# Altium PCB DOD Overdrive.PcbDoc
Units mm, origin at the board's own origin, x right, y up, seen from the top; angles counter-clockwise.
Board outline 57.16 x 79.55 mm, 4 copper layers (Top Layer, Gnd, Power, Bottom Layer), stack 0.603 mm thick; 36 components, 28 nets, 96 pads, 11 vias.
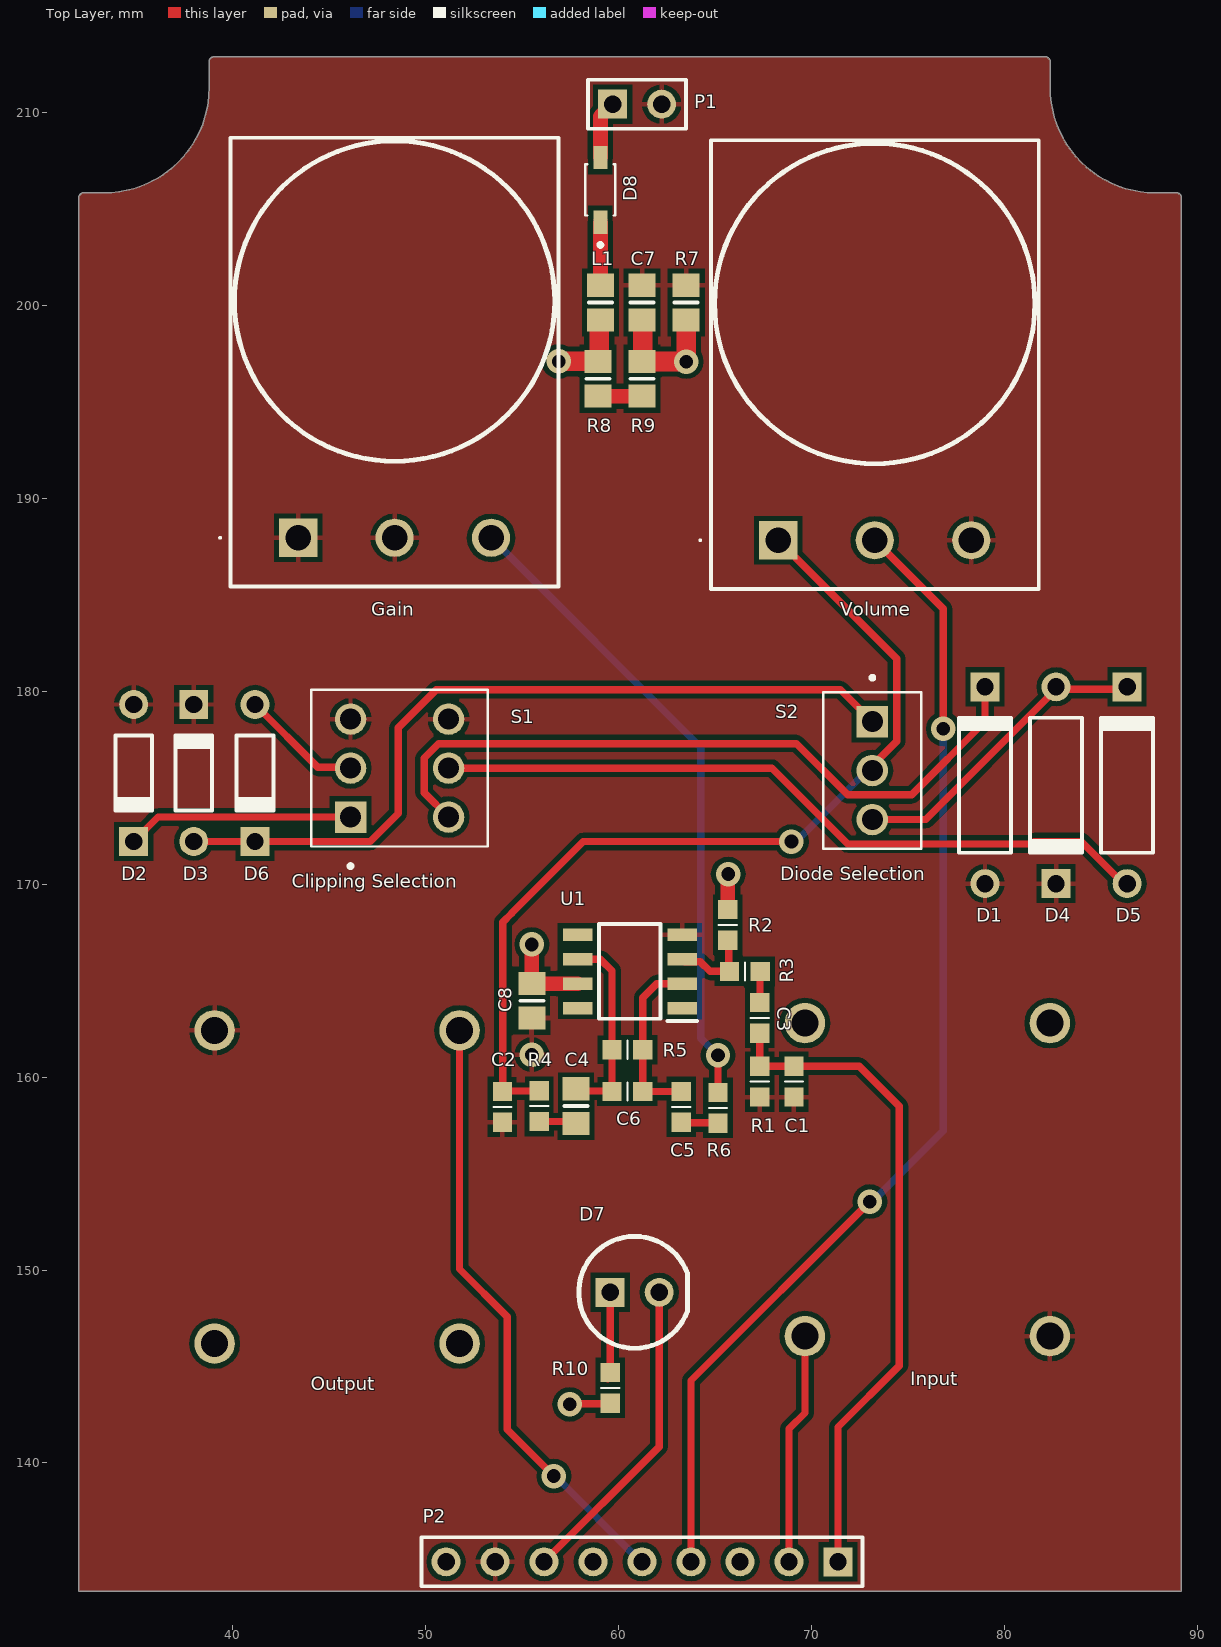
[diagram p0: Top Layer view]
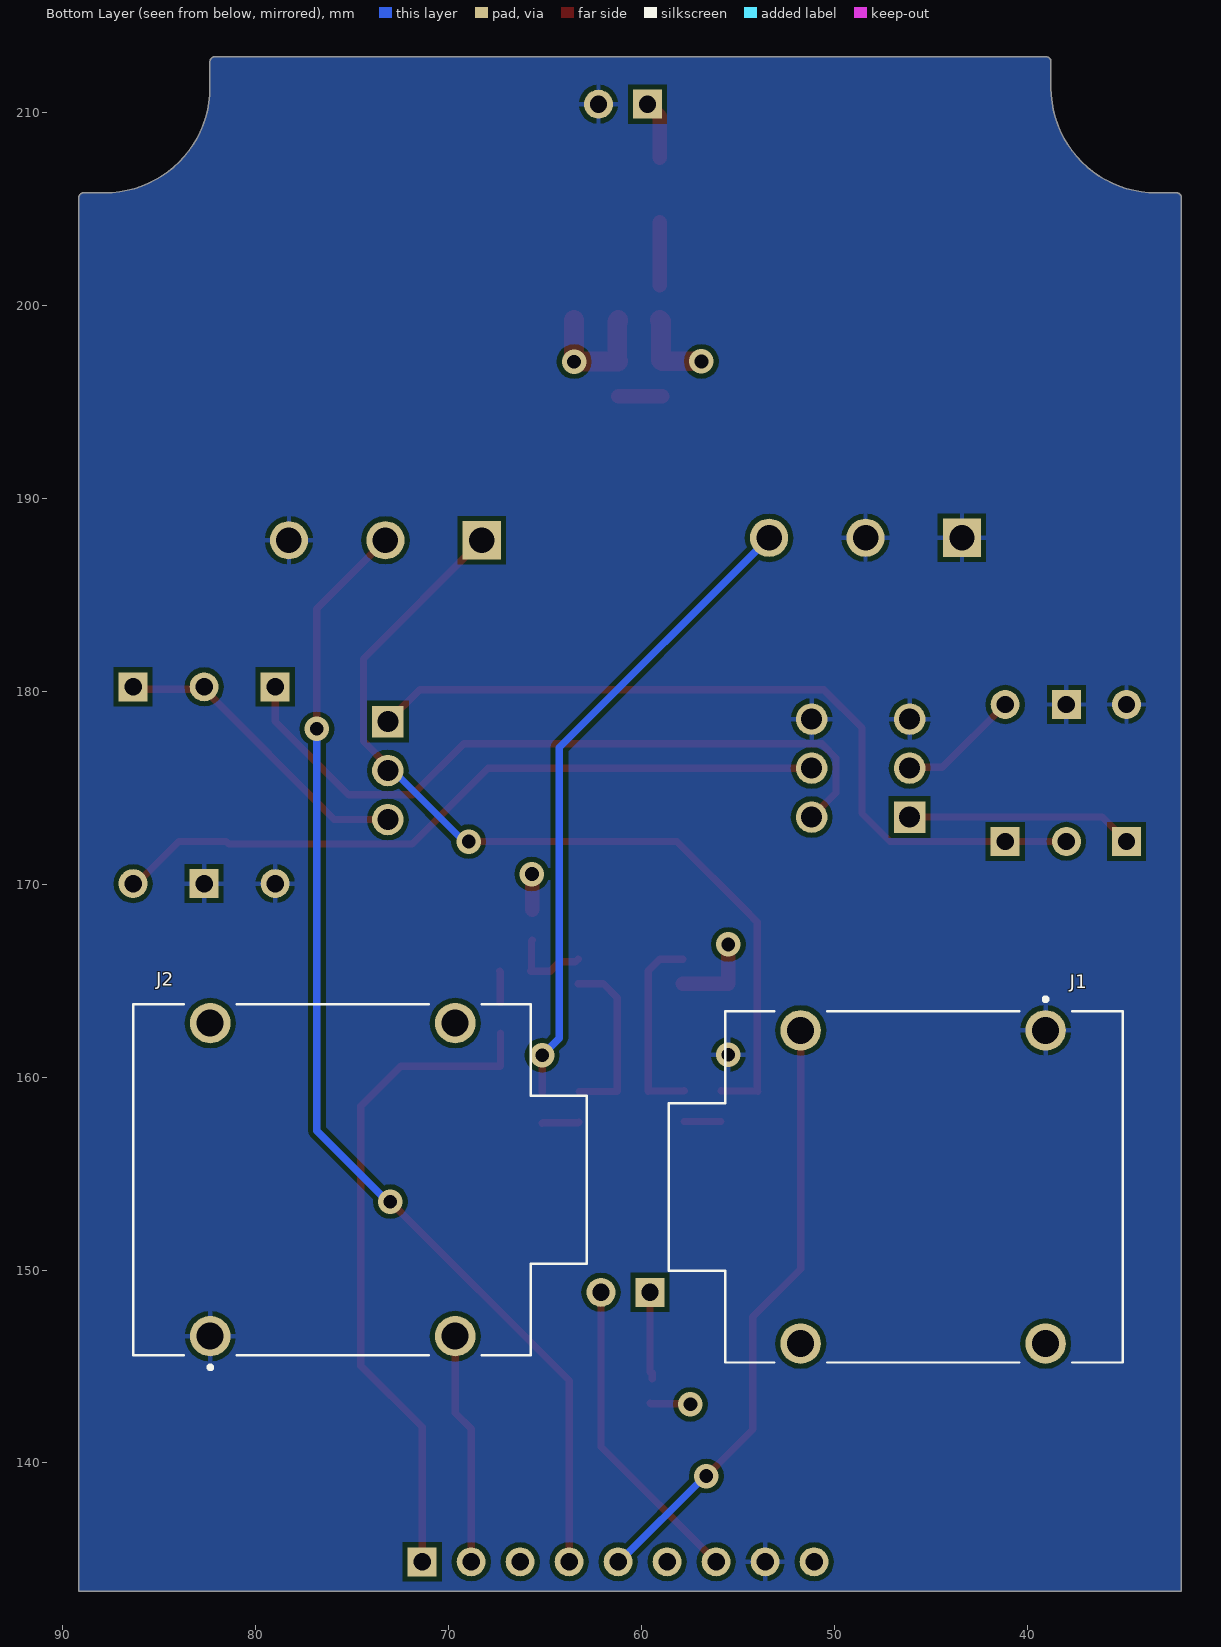
[diagram p1: Bottom Layer view, seen from below]
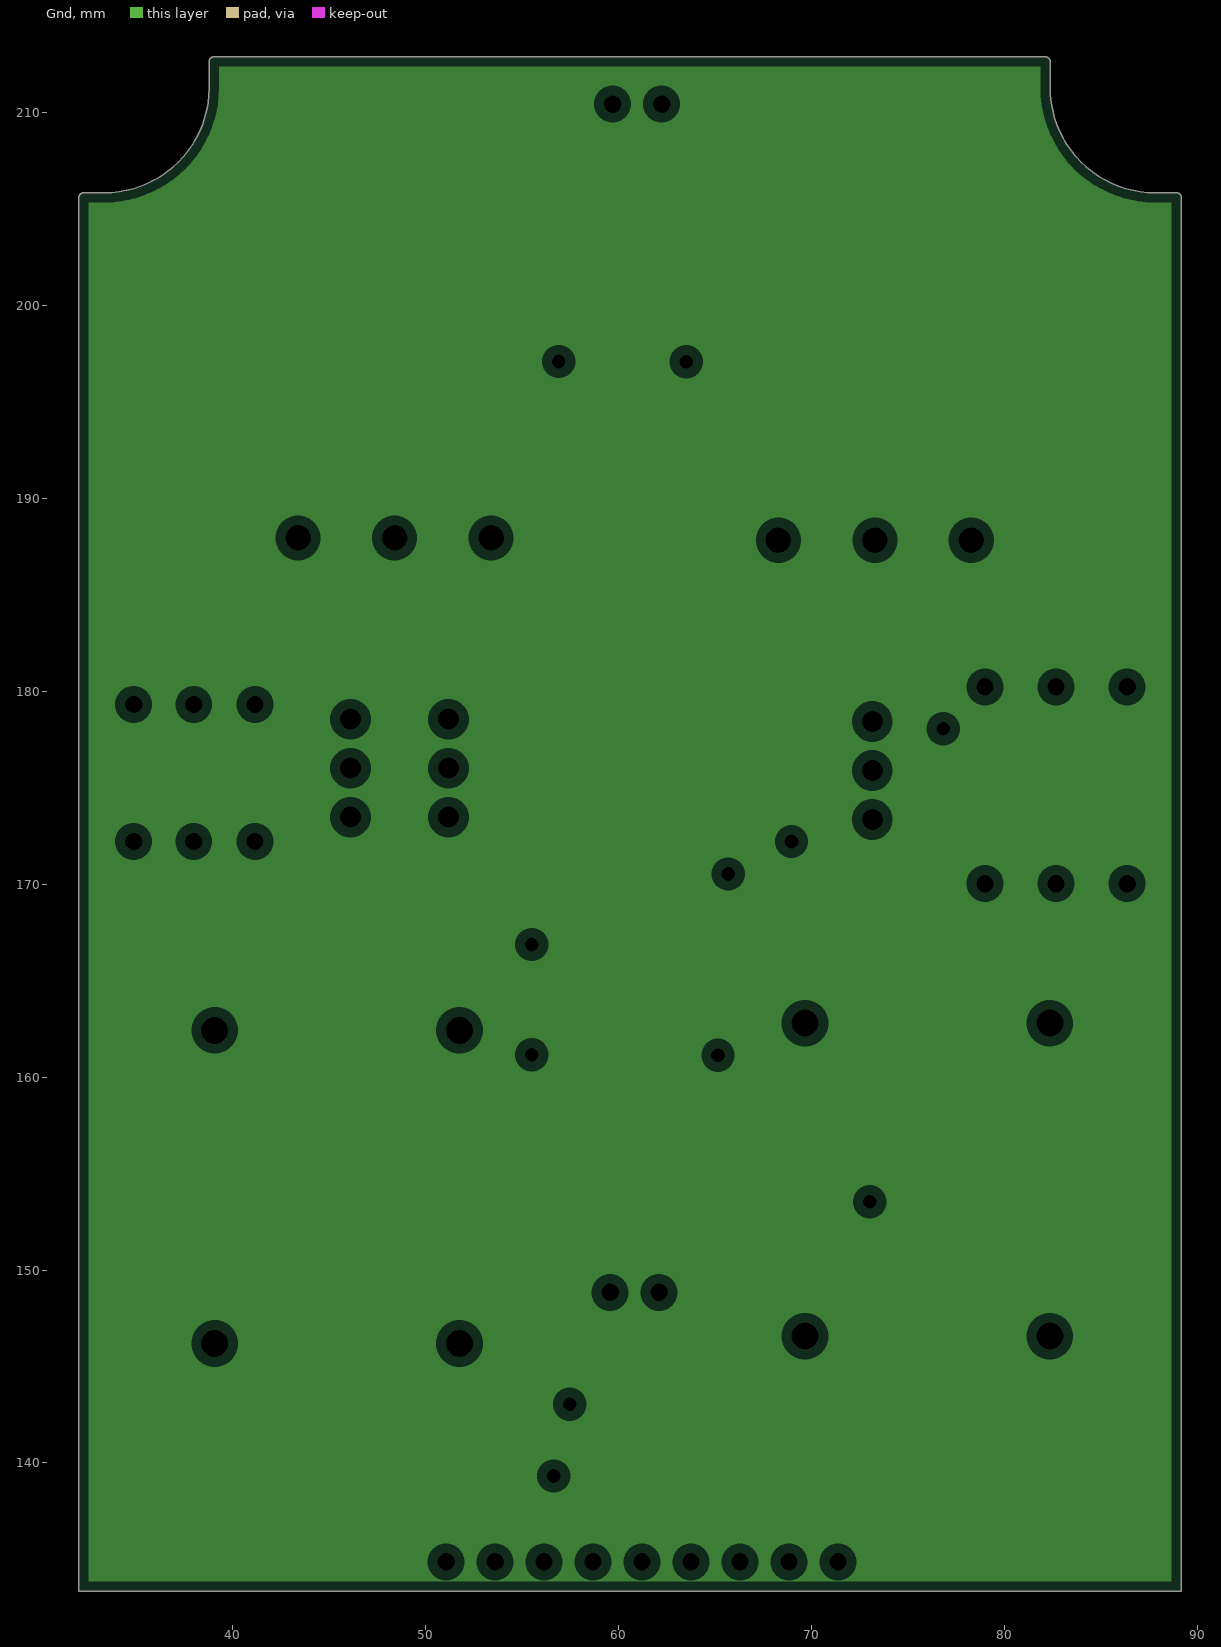
[diagram p2: Gnd, clearances drawn from the general rule]
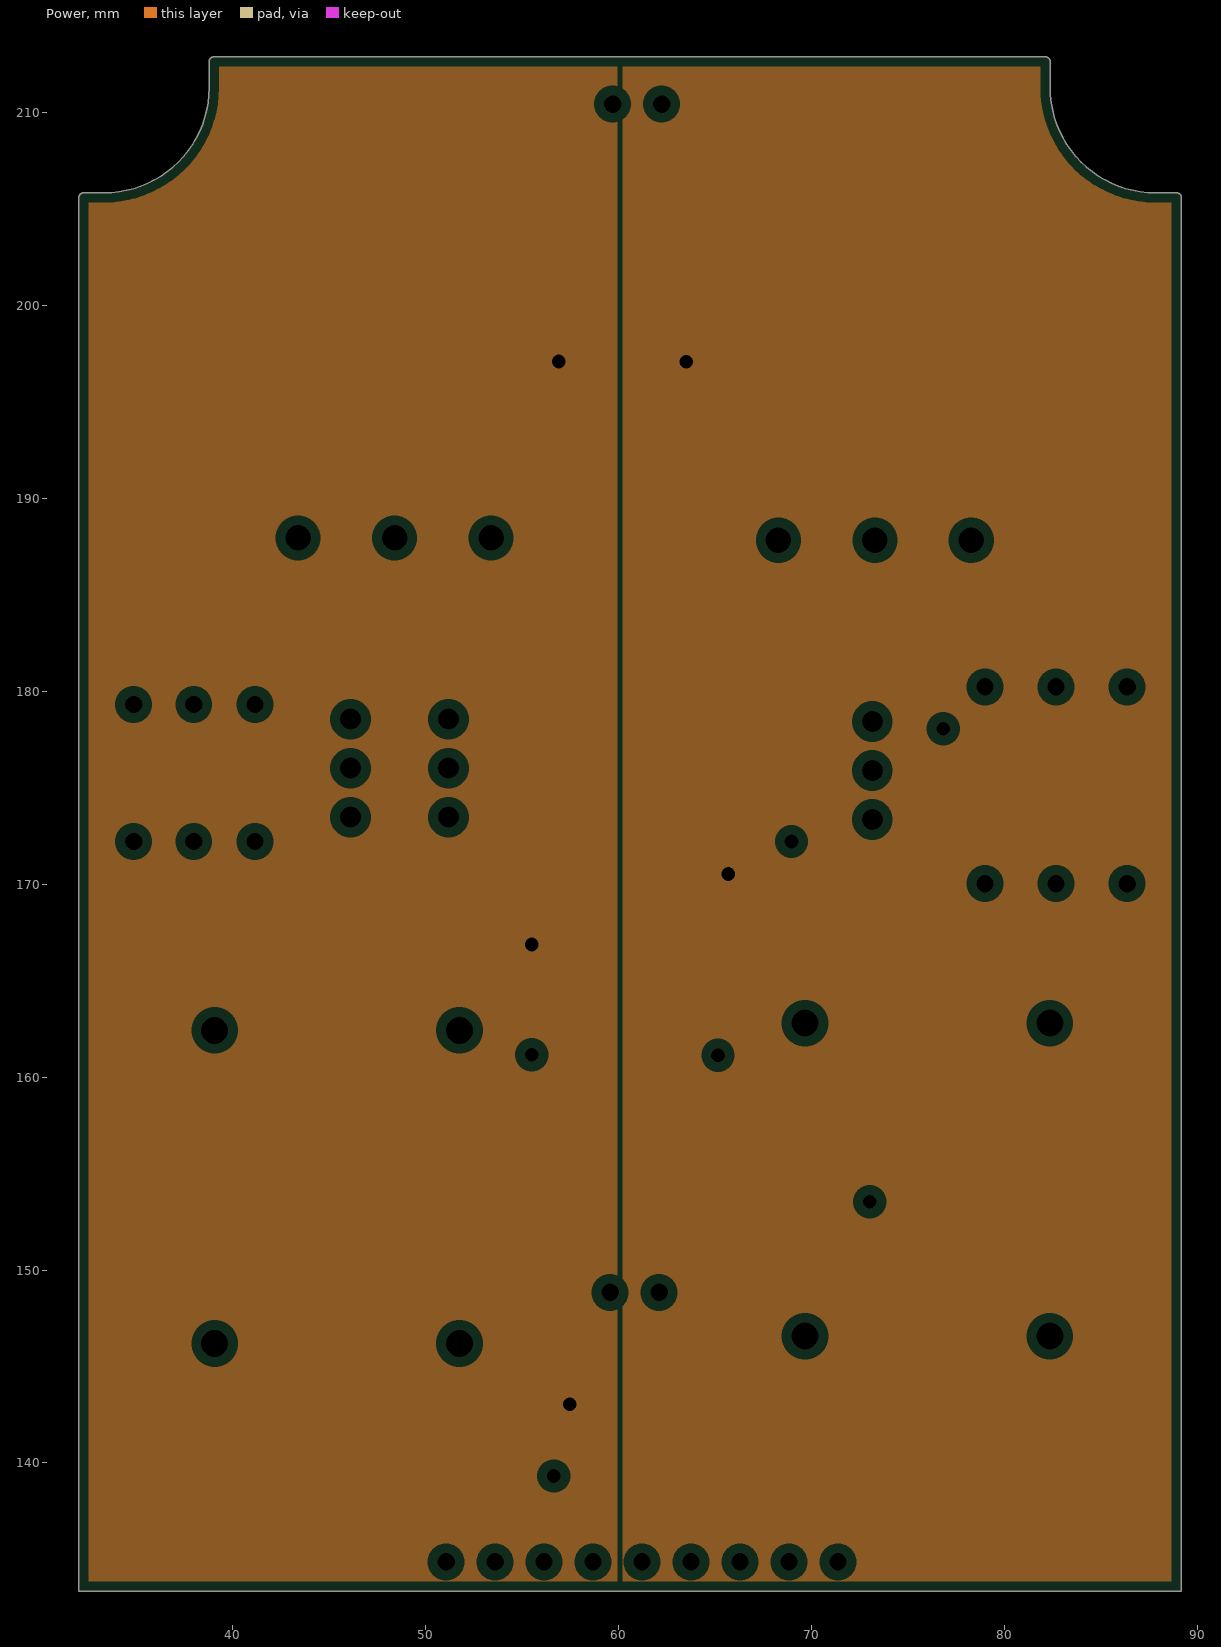
[diagram p3: Power, clearances drawn from the general rule]

## Layer stack, top to bottom
Top Solder: solder mask 0.0102, Solder Resist, Dk 3.5
Top Layer: signal copper 0.0356
Dielectric 2: prepreg 0.0711, PP-006, Dk 4.1
Gnd: plane copper 0.035
Dielectric 1: dielectric 0.32, FR-4, Dk 4.8
Power: plane copper 0.035, net (Multiple Nets)
Dielectric 3: prepreg 0.0711, PP-006, Dk 4.1
Bottom Layer: signal copper 0.0356
Bottom Solder: solder mask 0.0102, Solder Resist, Dk 3.5

## Board outline
32.014,133.35 89.173,133.35 89.173,205.595 ccw(c88.923,205.596) 88.923,205.845 87.823,205.845 cw(c87.823,211.295) 82.373,211.295 82.373,212.645 ccw(c82.123,212.646) 82.123,212.895 39.023,212.895 ccw(c39.023,212.646) 38.773,212.645 38.773,211.295 cw(c33.323,211.295) 33.323,205.845 32.264,205.845 32.26,205.845 32.256,205.845 32.252,205.845 32.248,205.845 32.245,205.845 32.241,205.844 32.237,205.844 32.233,205.844 32.229,205.843 32.225,205.842 32.221,205.842 32.217,205.841 32.213,205.84 32.21,205.839 32.206,205.839 32.202,205.838 32.198,205.837 32.194,205.836 32.191,205.834 32.187,205.833 32.183,205.832 32.179,205.831 32.176,205.829 32.172,205.828 32.168,205.826 32.165,205.825 32.161,205.823 32.158,205.822 32.154,205.82 32.151,205.818 32.147,205.816 32.144,205.815 32.14,205.813 32.137,205.811 32.133,205.809 32.13,205.807 32.127,205.804 32.124,205.802 32.12,205.8 32.117,205.798 32.114,205.795 32.111,205.793 32.108,205.791 32.105,205.788 32.102,205.786 32.099,205.783 32.096,205.78 32.093,205.778 32.09,205.775 32.087,205.772 32.085,205.769 32.082,205.767 32.079,205.764 32.077,205.761 32.074,205.758 32.071,205.755 32.069,205.752 32.067,205.749 32.064,205.746 32.062,205.742 32.06,205.739 32.057,205.736 32.055,205.733 32.053,205.729 32.051,205.726 32.049,205.723 32.047,205.719 32.045,205.716 32.043,205.712 32.041,205.709 32.04,205.705 32.038,205.702 32.036,205.698 32.035,205.695 32.033,205.691 32.032,205.688 32.03,205.684 32.029,205.68 32.028,205.676 32.026,205.673 32.025,205.669 32.024,205.665 32.023,205.661 32.022,205.658 32.021,205.654 32.02,205.65 32.019,205.646 32.019,205.642 32.018,205.638 32.017,205.635 32.017,205.631 32.016,205.627 32.016,205.623 32.015,205.619 32.015,205.615 32.015,205.611 32.014,205.607 32.014,205.603 32.014,205.599 32.014,205.595

## Design rules (kind name [scope] priority, off if disabled: settings)
Clearance [All] p1: gap=0.254 ignorepadtopadclearanceinfootprint=TRUE except(0: Arc-Hole Track-Hole SMDPad-Hole THPad-Hole Via-Hole Fill-Hole Poly-Hole Region-Hole Text-Hole)
ComponentClearance [All] p1: gap=0 collisioncheckmode=3 verticalgap=0 showdistances=FALSE
Height [All] p1: minheight=0 maxheight=254 prefheight=12.7
PlaneClearance [All] p1: clearance=0.508
PlaneConnect [All] p1: planeconnectstyle=Relief reliefexpansion=0.508 reliefentries=4 reliefconductorwidth=0.254 reliefairgap=0.254
PolygonConnect [All] p1: connectstyle=Relief reliefconductorwidth=0.254 reliefentries=4 polygonreliefangle="90 Angle" airgapwidth=0.254
RoutingVias [All] p1: holewidth=0.711 width=1.27 viastyle="Through Hole" minholewidth=0.711 minwidth=1.27 maxholewidth=0.711 maxwidth=1.27
SilkToSolderMaskClearance [IsPad] p1: minsilkscreentomaskgap=0.1 clearancetoexposedcopper=TRUE
SolderMaskExpansion [All] p1: expansion=0.102 istentingtop=FALSE
Width Width_Power [InNetClass('Power')] p1: maxlimit=1.27 minlimit=0.254 preferedwidth=0.762
Width [All] p2: maxlimit=0.508 minlimit=0.254 preferedwidth=0.381
25 further rules are at their usual default settings.

## Classes and differential pairs
net class Power: +4.5V +9V DC_IN NetD8_2 NetR8_1

## Components (designator, comment, footprint, x,y, rotation, side; value= is the part's Value field where it differs from the comment)
C1 "Cap" SMD_0603 69.088,159.766 r270 top value=20nF
C2 "Cap" SMD_0603 53.975,158.458 r270 top value=10nF
C3 "Cap" SMD_0603 67.31,163.068 r270 top value=10nF
C4 "Cap Pol" SMD_0805 57.785,158.496 r90 top value=100pF
C5 "Cap" SMD_0603 63.246,158.458 r90 top value=47nF
C6 "Cap" SMD_0603 60.452,159.258 r180 top value=120pF
C7 "Cap Pol" SMD_0805 61.214,200.152 r270 top value=100pF
C8 "Cap Pol" SMD_0805 55.499,163.957 r90 top value=100pF
D1 "1N34A" DO-7 78.994,175.133 r90 top
D2 "1N4154" DO-35 34.859,175.768 r270 top
D3 "1N4154" DO-35 37.973,175.768 r90 top
D4 "1N34A" DO-7 82.677,175.133 r270 top
D5 "1N34A" DO-7 86.36,175.133 r90 top
D6 "1N4154" DO-35 41.148,175.768 r270 top
D7 "LED TH" LED5mm 59.563,148.844 r0 top
D8 "Schottky" SOD123 59.055,205.994 r90 top
Gain "Potentiometer, Logarithmic" PDB181K420K103B 43.387,187.96 r0 top locked value=100k
J1 "Output" NEUTRIK_NMJ4HCD2 35.052,154.305 r180 bottom locked
J2 "Input" NEUTRIK_NMJ4HCD2 86.36,154.686 r0 bottom locked
L1 "Bead" SMD_0805 59.055,200.152 r270 top
P1 "Header 2" HDR1X2_2.54 59.69,210.439 r0 top
P2 "Header 9" HDR1X9_2.54 71.374,134.874 r180 top
R1 "Res" SMD_0603 67.31,159.766 r270 top value=1M
R2 "Res" SMD_0603 65.659,167.894 r90 top value=470k
R3 "Res" SMD_0603 66.548,165.481 r0 top value=10k
R4 "Res" SMD_0603 55.88,158.496 r270 top value=10k
R5 "Res" SMD_0603 60.452,161.417 r180 top value=1M
R6 "Res" SMD_0603 65.151,158.407 r270 top value=4.7k
R7 "Res" SMD_0805 63.5,200.152 r90 top value=1M
R8 "Res" SMD_0805 58.928,196.204 r90 top value=100
R9 "Res" SMD_0805 61.214,196.204 r270 top value=1M
R10 "Res" SMD_0603 59.563,143.891 r90 top value=470k
S1 "Clipping Selection" SW_200MDP1T1B1M2QEH 48.641,176.022 r90 top locked
S2 "Diode Selection" SW_200MSP1T2B4M2QE 73.152,175.895 r270 top locked
U1 "TL081H" SOIC127P600X175-8N 60.579,165.481 r180 top
Volume "Potentiometer, Linear" PDB181K420K103B 68.279,187.833 r0 top locked value=100k

## Footprints (in the part's own frame and the unit in brackets; to place one, negate y for a bottom-side part, rotate by r counter-clockwise, add the part's x,y. Pads: shape width x height; smd on the part's side, far side on the other; paste and mask are expansions set on the pad)
DO-7 [mm] "Diode, Axial; Body 7 x 2.7 mm (LxDia. max), Lead Dia. 0.53 mm (max)"
  round 1.5 hole 0.9: 1(-5.1,0)
  rect 1.5x1.5 hole 0.9: 2(5.1,0)
  silkscreen extent -3.5,-1.35 3.6,1.35, body extent -5.35,-1.22 5.31,1.22, height 2.94
DO-35 [mm] "Diode, Axial; Body 3.8 x 1.9 mm (LxDia. max), Lead Dia. 0.53 mm (max)"
  round 1.5 hole 0.9: 1(-3.55,0)
  rect 1.5x1.5 hole 0.9: 2(3.55,0)
  silkscreen extent -1.95,-0.95 2.05,0.95, body extent -3.78,-0.93 3.78,0.92, height 1.92
HDR1X2_2.54 [mm] "Connector; Header; 2 Position; 2.54mm"
  rect 1.5x1.5 hole 0.9: 1(0,0)
  round 1.5 hole 0.9: 2(2.54,0)
  silkscreen extent -1.27,-1.27 3.81,1.27, body extent -1.27,-1.27 3.81,1.27, height 9.5
HDR1X9_2.54 [mm] "Connector; Header; 9 Position; 2.54mm"
  rect 1.5x1.5 hole 0.9: 1(0,0)
  round 1.5 hole 0.9: 2(2.54,0) 3(5.08,0) 4(7.62,0) 5(10.16,0) 6(12.7,0) 7(15.24,0) 8(17.78,0) 9(20.32,0)
  silkscreen extent -1.27,-1.27 21.59,1.27, body extent -1.27,-1.27 21.59,1.27, height 9.5
LED5mm [mm] "Led 5 mm"
  rect 1.5x1.5 hole 0.9: 1(0,0)
  round 1.5 hole 0.9: 2(2.54,0)
  silkscreen extent -1.63,-2.9 4,2.9, body extent -1.7,-2.95 3.7,2.94, height 8.7
NEUTRIK_NMJ4HCD2 [mm]
  round 2.1 hole 1.4: S(-4,8.115) SN(-4,-8.115) T(-16.7,8.115) TN(-16.7,-8.115)
  silkscreen extent -23.53,-9.1 0,9.83, body extent -23.51,-9.06 7.49,9.14, height 15.59
PDB181K420K103B [mm]
  rect 1.98x1.98 hole 1.32: 1(0,0)
  round 1.98 hole 1.32: 2(5,0) 3(10,0)
  silkscreen extent -4.1,-2.52 13.5,20.74, body extent -3.48,-4.32 13.52,20.68, height 30
SMD_0603 [mm] "SMD, Body 0.06x0.03 inch, 1.6x0.8mm, IPC Medium Density"
  rect 1x1 smd: 1(-0.8,0) 2(0.8,0)
  silkscreen extent 0,-0.48 0,0.47, body extent -0.87,-0.48 0.87,0.48, height 0.85
SMD_0805 [mm] "SMD, Body 0.08x0.05 inch, Body 2.0x1.3mm, IPC Medium Density"
  rect 1.2x1.4 smd: 1(-0.9,0) 2(0.9,0)
  silkscreen extent 0,-0.6 0,0.6, body extent -1.07,-0.7 1.07,0.7, height 0.65
SOD123 [mm]
  rect 1.21x0.73 smd: 1(1.68,0) 2(-1.68,0)
  silkscreen extent -2.95,-0.77 1.33,0.77, body extent -1.83,-0.77 1.83,0.77, height 1.44
SOIC127P600X175-8N [mm]
  rect 1.528x0.65 smd: 1(-2.711,1.905) 2(-2.711,0.635) 3(-2.711,-0.635) 4(-2.711,-1.905) 5(2.711,-1.905) 6(2.711,-0.635) 7(2.711,0.635) 8(2.711,1.905)
  silkscreen extent -3.47,-2.45 1.6,2.58, body extent -3.01,-2.45 3.01,2.45, height 1.63
SW_200MDP1T1B1M2QEH [mm]
  rect 1.635x1.635 hole 1.09: 1(-2.54,2.54)
  round 1.635 hole 1.09: 2(0,2.54) 3(2.54,2.54) 4(-2.54,-2.54) 5(0,-2.54) 6(2.54,-2.54)
  silkscreen extent -5.18,-4.57 4.07,4.57, body extent -4.02,-4.6 4.12,4.54, height 19.5
SW_200MSP1T2B4M2QE [mm]
  rect 1.635x1.635 / inner round 1.635 / far side rect 1.635x1.635 hole 1.09: 1(-2.54,0)
  round 1.635 hole 1.09: 2(0,0) 3(2.54,0)
  silkscreen extent -4.91,-2.54 4.07,2.54, body extent -4.07,-3.05 4.06,3.05, height 19.55

## Part data
C1 C2 C3 C5 C6: "Capacitor", LatestRevisionDate=17-Jul-2002, LatestRevisionNote="Re-released for DXP Platform.", PackageDescription="Radial Cap, Thru-Hole; 2 Leads; 0.3 in Pin Spacing", PackageReference=RAD-0.3, Published=8-Jun-2000, Publisher="Altium Limited"
C4 C7 C8: "Polarized Capacitor", LatestRevisionDate=17-Jul-2002, LatestRevisionNote="Re-released for DXP Platform.", PackageDescription="Polarized Capacitor; 2 Leads", PackageReference=POLAR0.8, Published=8-Jun-2000, Publisher="Altium Limited"
D1 D4 D5: library part "Diode 1N434A", "Germanium Diode", Code_JEDEC=DO-204-AH, ComponentLink1Description="Manufacturer Link", ComponentLink1URL=http://www.fairchildsemi.com/, DatasheetVersion=1997, LatestRevisionDate=17-Jul-2002, LatestRevisionNote="Re-released for DXP Platform.", PackageDescription="Diode, Axial; Body 3.8 x 1.9 mm (LxDia. max), Lead Dia. 0.53 mm (max)", PackageReference=DO-35, Published=8-Jun-2000, Publisher="Altium Limited"
D2 D3 D6: library part "Diode 1N4154", "High Conductance Ultra Fast Diode", Code_JEDEC=DO-204-AH, ComponentLink1Description="Manufacturer Link", ComponentLink1URL=http://www.fairchildsemi.com/, DatasheetVersion=1997, LatestRevisionDate=17-Jul-2002, LatestRevisionNote="Re-released for DXP Platform.", PackageDescription="Diode, Axial; Body 3.8 x 1.9 mm (LxDia. max), Lead Dia. 0.53 mm (max)", PackageReference=DO-35, Published=8-Jun-2000, Publisher="Altium Limited"
D7: library part "LED TH, 5mm", "Typical RED, GREEN, YELLOW, AMBER GaAs LED", LatestRevisionDate=17-Jul-2002, LatestRevisionNote="Re-released for DXP Platform.", PackageDescription="SM LED; 2 Flat Leads", PackageReference=3.2X1.6X1.1, PackageVersion=Feb-2002, Published=8-Jun-2000, Publisher="Altium Limited"
D8: library part "Diode Schottky", "Schottky Diode", Code_JEDEC=DO-204-AH, ComponentLink1Description="Manufacturer Link", ComponentLink1URL=http://www.fairchildsemi.com/, DatasheetVersion=1997, LatestRevisionDate=17-Jul-2002, LatestRevisionNote="Re-released for DXP Platform.", PackageDescription="Diode, Axial; Body 3.8 x 1.9 mm (LxDia. max), Lead Dia. 0.53 mm (max)", PackageReference=DO-35, Published=8-Jun-2000, Publisher="Altium Limited"
Gain: "Logarithmic Potentiometer, TH, 5.08mm", Type=Log
J1 J2: library part NMJ4HCD2, "1/4 mono jack, switched, with chrome ferrule and straight PCB pins, mounting nut included", Package=None, Availability="In Stock", Check_prices=https://www.snapeda.com/parts/NMJ4HCD2/Neutrik/view-part/?ref=eda, MF=Neutrik, MP=NMJ4HCD2, Price=None, Purchase-URL=https://pricing.snapeda.com/search/part/NMJ4HCD2/?ref=eda, SnapEDA_Link=https://www.snapeda.com/parts/NMJ4HCD2/Neutrik/view-part/?ref=snap
L1: "Ferrite Bead"
P1: "Header, 2-Pin", LatestRevisionDate=17-Jul-2002, LatestRevisionNote="Re-released for DXP Platform.", Publisher="Altium Limited"
P2: "Header, 9-Pin", LatestRevisionDate=17-Jul-2002, LatestRevisionNote="Re-released for DXP Platform.", Publisher="Altium Limited"
R1 R2 R3 R4 R5 R6 R7 R8 R9 R10: "Resistor", LatestRevisionDate=17-Jul-2002, LatestRevisionNote="Re-released for DXP Platform.", PackageReference=SMD, Published=8-Jun-2000, Publisher="Altium Limited"
S1: library part 200MDP1T1B1M2QEH, Package=None, Availability=Unavailable, MP=200MDP1T1B1M2QEH, Price=None
S2: library part 200MSP1T2B4M2QE, Package=None, Availability=Unavailable, MP=200MSP1T2B4M2QE, Price=None
U1: "Opamp Single"
Volume: "Linear Potentiometer, TH, 5.08mm", Type=Lin

## Via types
v1: diameter 1.27, hole 0.711, Top Layer to Bottom Layer, 11 vias

## Nets (pads, with @x,y where several pads share a name; then routed paths per layer and width w, separated by ;. In a path a pad name is that pad's centre, name@x,y a point inside that pad or via, vN(x,y) a via of type N, cw(c..) or ccw(c..) an arc to the next point about the centre after c; other vN are vias at no path point)
+4.5V: C7.2 R2.2 R7.1 R9.1 | length 8
  Top Layer w0.762: R2.2 65.659,170.509 v1(65.68,170.53)
  Top Layer w1.016: R9.1 61.219,197.099 63.494,197.099 v1(63.5,197.093) ; C7.2 61.214,199.195 61.249,199.16 61.249,197.196 R9.1@61.341,197.196 ; v1@63.5,197.509 R7.1
+9V: C8.2 L1.2 R8.2 R10.1 U1.7 | length 10.7
  Top Layer w0.381: v1(57.467,143.035) 57.495,143.063 59.535,143.063 R10.1
  Top Layer w0.762: C8.2 v1(55.499,166.878) ; C8.2@55.51,164.846 U1.7
  Top Layer w1.016: v1(56.896,197.104) R8.2 58.991,197.168 58.991,199.188 L1.2
DC_IN: D8.1 P1.1 | length 3
  Top Layer w0.762: D8.1 59.055,209.804 P1.1
InputJack: J2.T P2.2 | length 12
  Top Layer w0.381: P2.2 68.834,141.764 69.66,142.59 J2.T
LedCathode: D7.2 P2.7 | length 16.4
  Top Layer w0.381: P2.7 62.103,140.843 D7.2
LedGnd: C1.2 C2.2 C7.1 C8.1 D1.1 D2.1 D3.2 D4.2 Gain.1 Gain.2 J1.S J2.S P1.2 P2.8 R1.2 R7.2 S1.3 S1.6 U1.4 Volume.3
  other v1: 55.499,161.163
NetC2_1: C2.1 R4.1 S2.2 Volume.1 | length 48.1
  Top Layer w0.381: C2.1 C2.1@53.994,159.277 ; R4.1 55.861,159.277 C2.1@53.994,159.277 ; Volume.1 74.414,181.698 74.414,177.411 73.152,176.149 S2.2 ; v1(68.961,172.212) 58.166,172.212 54.45,168.496 54.45,168.48 53.994,168.024 C2.1@53.994,159.277
  Bottom Layer w0.381: v1(68.961,172.212) 69.202,172.212 72.885,175.895 S2.2
NetC3_1: C3.1 R3.2 | length 1.6
  Top Layer w0.381: C3.1 67.329,163.887 67.329,165.462 R3.2
NetC4_1: C4.1 R4.2 | length 1.9
  Top Layer w0.381: R4.2 C4.1@57.785,157.696
NetC4_2: C4.2 C6.2 R5.2 U1.6 | length 10.2
  Top Layer w0.381: C4.2@57.785,159.296 57.804,159.277 59.633,159.277 C6.2 R5.2 59.652,165.519 59.055,166.116 U1.6
NetC5_1: C5.1 R6.2 | length 1.9
  Top Layer w0.381: C5.1 63.272,157.632 65.126,157.632 R6.2
NetC5_2: C5.2 C6.1 R5.1 U1.2 | length 9.2
  Top Layer w0.381: C5.2 C6.1 R5.1 61.252,164.122 61.976,164.846 U1.2
NetD1_2: D1.2 S1.4 | length 37.4
  Top Layer w0.381: S1.4 49.919,174.744 49.919,176.545 50.658,177.284 69.223,177.284 71.874,174.633 75.192,174.633 78.994,178.435 D1.2
NetD2_2: D2.2 S1.1 | length 11.8
  Top Layer w0.381: D2.2 36.123,173.482 S1.1
NetD3_1: D3.1 D6.2 S2.1 | length 41.7
  Top Layer w0.381: D3.1 D6.2 47.123,172.218 48.57,173.665 48.57,178.11 50.546,180.086 71.501,180.086 S2.1
NetD4_1: D4.1 D5.2 S2.3 | length 16.1
  Top Layer w0.381: S2.3 75.926,173.355 82.677,180.106 86.294,180.106 D5.2@86.421,179.979
NetD5_1: D5.1 S1.5 | length 37.9
  Top Layer w0.381: S1.5 67.945,176.022 71.882,172.085 81.407,172.085 81.534,172.212 83.988,172.212 D5.1@86.421,169.779
NetD6_1: D6.1 S1.2 | length 6.3
  Top Layer w0.381: D6.1 44.409,176.057 46.066,176.057 S1.2
NetD7_1: D7.1 R10.2 | length 4.5
  Top Layer w0.381: R10.2@59.436,144.366 R10.2@59.436,144.691 ; R10.2 D7.1
NetD8_2: D8.2 L1.1 | length 3.3
  Top Layer w0.762: L1.1 D8.2
NetGain_3: Gain.3 R6.1 | length 33.6
  Top Layer w0.381: R6.1 v1(65.151,161.135)
  Bottom Layer w0.381: Gain.3 64.262,177.085 64.262,162.024 v1(65.151,161.135)
NetR2_1: R2.1 R3.1 U1.3 | length 4.4
  Top Layer w0.381: U1.3 63.425,165.981 64.232,165.981 64.733,165.481 R3.1 65.704,165.526 65.704,167.05 R2.1
NetR8_1: R8.1 R9.2 | length 2.3
  Top Layer w0.762: R8.1 R9.2
OutputJack: J1.T P2.5 | length 31.5
  Top Layer w0.381: J1.T 51.752,150.051 54.229,147.574 54.229,141.732 v1(56.642,139.319)
  Bottom Layer w0.381: v1(56.642,139.319) 56.706,139.319 61.151,134.874 P2.5
PedalBypassReturn: P2.6
PedalBypassSend: P2.3
PedalInput: C1.1 C3.2 P2.1 R1.1 | length 34.7
  Top Layer w0.381: C3.2 R1.1 C1.1 72.479,160.566 74.549,158.496 74.549,145.034 71.374,141.859 P2.1
PedalOutput: P2.4 Volume.2 | length 59.9
  Top Layer w0.381: P2.4 63.754,144.272 v1(73.025,153.543) ; Volume.2 76.835,184.277 v1(76.835,178.054)
  Bottom Layer w0.381: v1(73.025,153.543) 73.152,153.543 76.835,157.226 v1(76.835,178.054)
pads on no net: J1.SN J1.TN J2.SN J2.TN P2.9 U1.1 U1.5 U1.8

## Polygon pours and split planes (outlines as drawn)
LedGnd on Bottom Layer "GND_BOTTOM" (solid, pour order 1): 32.014,133.35 89.173,133.35 89.173,205.595 ccw(c88.923,205.596) 88.923,205.845 87.823,205.845 cw(c87.823,211.295) 82.373,211.295 82.373,212.645 ccw(c82.123,212.646) 82.123,212.895 39.023,212.895 ccw(c39.023,212.646) 38.773,212.645 38.773,211.295 cw(c33.323,211.295) 33.323,205.845 32.264,205.845 32.26,205.845 32.256,205.845 32.252,205.845 32.248,205.845 32.245,205.845 32.241,205.844 32.237,205.844 32.233,205.844 32.229,205.843 32.225,205.842 32.221,205.842 32.217,205.841 32.213,205.84 32.21,205.839 32.206,205.839 32.202,205.838 32.198,205.837 32.194,205.836 32.191,205.834 32.187,205.833 32.183,205.832 32.179,205.831 32.176,205.829 32.172,205.828 32.168,205.826 32.165,205.825 32.161,205.823 32.158,205.822 32.154,205.82 32.151,205.818 32.147,205.816 32.144,205.815 32.14,205.813 32.137,205.811 32.133,205.809 32.13,205.807 32.127,205.804 32.124,205.802 32.12,205.8 32.117,205.798 32.114,205.795 32.111,205.793 32.108,205.791 32.105,205.788 32.102,205.786 32.099,205.783 32.096,205.78 32.093,205.778 32.09,205.775 32.087,205.772 32.085,205.769 32.082,205.767 32.079,205.764 32.077,205.761 32.074,205.758 32.071,205.755 32.069,205.752 32.067,205.749 32.064,205.746 32.062,205.742 32.06,205.739 32.057,205.736 32.055,205.733 32.053,205.729 32.051,205.726 32.049,205.723 32.047,205.719 32.045,205.716 32.043,205.712 32.041,205.709 32.04,205.705 32.038,205.702 32.036,205.698 32.035,205.695 32.033,205.691 32.032,205.688 32.03,205.684 32.029,205.68 32.028,205.676 32.026,205.673 32.025,205.669 32.024,205.665 32.023,205.661 32.022,205.658 32.021,205.654 32.02,205.65 32.019,205.646 32.019,205.642 32.018,205.638 32.017,205.635 32.017,205.631 32.016,205.627 32.016,205.623 32.015,205.619 32.015,205.615 32.015,205.611 32.014,205.607 32.014,205.603 32.014,205.599 32.014,205.595
LedGnd on Top Layer "GND_TOP" (solid, pour order 0): 32.014,133.35 89.173,133.35 89.173,205.595 ccw(c88.923,205.596) 88.923,205.845 87.823,205.845 cw(c87.823,211.295) 82.373,211.295 82.373,212.645 ccw(c82.123,212.646) 82.123,212.895 39.023,212.895 ccw(c39.023,212.646) 38.773,212.645 38.773,211.295 cw(c33.323,211.295) 33.323,205.845 32.264,205.845 32.26,205.845 32.256,205.845 32.252,205.845 32.248,205.845 32.245,205.845 32.241,205.844 32.237,205.844 32.233,205.844 32.229,205.843 32.225,205.842 32.221,205.842 32.217,205.841 32.213,205.84 32.21,205.839 32.206,205.839 32.202,205.838 32.198,205.837 32.194,205.836 32.191,205.834 32.187,205.833 32.183,205.832 32.179,205.831 32.176,205.829 32.172,205.828 32.168,205.826 32.165,205.825 32.161,205.823 32.158,205.822 32.154,205.82 32.151,205.818 32.147,205.816 32.144,205.815 32.14,205.813 32.137,205.811 32.133,205.809 32.13,205.807 32.127,205.804 32.124,205.802 32.12,205.8 32.117,205.798 32.114,205.795 32.111,205.793 32.108,205.791 32.105,205.788 32.102,205.786 32.099,205.783 32.096,205.78 32.093,205.778 32.09,205.775 32.087,205.772 32.085,205.769 32.082,205.767 32.079,205.764 32.077,205.761 32.074,205.758 32.071,205.755 32.069,205.752 32.067,205.749 32.064,205.746 32.062,205.742 32.06,205.739 32.057,205.736 32.055,205.733 32.053,205.729 32.051,205.726 32.049,205.723 32.047,205.719 32.045,205.716 32.043,205.712 32.041,205.709 32.04,205.705 32.038,205.702 32.036,205.698 32.035,205.695 32.033,205.691 32.032,205.688 32.03,205.684 32.029,205.68 32.028,205.676 32.026,205.673 32.025,205.669 32.024,205.665 32.023,205.661 32.022,205.658 32.021,205.654 32.02,205.65 32.019,205.646 32.019,205.642 32.018,205.638 32.017,205.635 32.017,205.631 32.016,205.627 32.016,205.623 32.015,205.619 32.015,205.615 32.015,205.611 32.014,205.607 32.014,205.603 32.014,205.599 32.014,205.595
+9V on Power (split plane): 59.942,133.86 32.525,133.86 32.525,205.335 33.323,205.335 33.325,205.335 33.657,205.345 33.99,205.373 34.321,205.419 34.649,205.485 34.973,205.568 35.292,205.67 35.604,205.789 35.909,205.925 36.206,206.079 36.494,206.249 36.772,206.434 37.039,206.636 37.295,206.851 37.538,207.081 37.767,207.324 37.983,207.579 38.184,207.846 38.37,208.124 38.54,208.412 38.693,208.709 38.83,209.015 38.949,209.327 39.05,209.645 39.134,209.969 39.199,210.297 39.246,210.628 39.274,210.961 39.283,211.294 39.284,211.295 39.284,212.385 59.942,212.385
+4.5V on Power (split plane): 81.863,211.295 81.863,211.294 81.872,210.961 81.9,210.628 81.947,210.297 82.012,209.969 82.096,209.645 82.197,209.327 82.316,209.015 82.453,208.709 82.606,208.412 82.776,208.124 82.962,207.846 83.163,207.579 83.379,207.324 83.608,207.081 83.851,206.851 84.107,206.635 84.374,206.434 84.652,206.249 84.94,206.079 85.237,205.925 85.542,205.789 85.854,205.67 86.173,205.568 86.497,205.485 86.825,205.419 87.156,205.373 87.489,205.345 87.821,205.335 87.823,205.335 88.663,205.335 88.663,133.86 60.2,133.86 60.2,212.385 81.863,212.385
no net on Gnd (split plane): 81.863,211.295 81.863,211.294 81.872,210.961 81.9,210.628 81.947,210.297 82.012,209.969 82.096,209.645 82.197,209.327 82.316,209.015 82.453,208.709 82.606,208.412 82.776,208.124 82.962,207.846 83.163,207.579 83.379,207.324 83.608,207.081 83.851,206.851 84.107,206.635 84.374,206.434 84.652,206.249 84.94,206.079 85.237,205.925 85.542,205.789 85.854,205.67 86.173,205.568 86.497,205.485 86.825,205.419 87.156,205.373 87.489,205.345 87.821,205.335 87.823,205.335 88.663,205.335 88.663,133.86 32.525,133.86 32.525,205.335 33.323,205.335 33.325,205.335 33.657,205.345 33.99,205.373 34.321,205.419 34.649,205.485 34.973,205.568 35.292,205.67 35.604,205.789 35.909,205.925 36.206,206.079 36.494,206.249 36.772,206.434 37.039,206.636 37.295,206.851 37.538,207.081 37.767,207.324 37.983,207.579 38.184,207.846 38.37,208.124 38.54,208.412 38.693,208.709 38.83,209.015 38.949,209.327 39.05,209.645 39.134,209.969 39.199,210.297 39.246,210.628 39.274,210.961 39.283,211.294 39.284,211.295 39.284,212.385 81.863,212.385

## Other copper
Power (plane layer: these items are gaps in the copper):
  lines w0.254: 60.071,133.35 60.071,212.725

## Silkscreen, mask and mechanical layers (free items; w line width, h text height)
Mechanical 11: